# EAGLE board Sensor module (EAGLE 9.3.1)
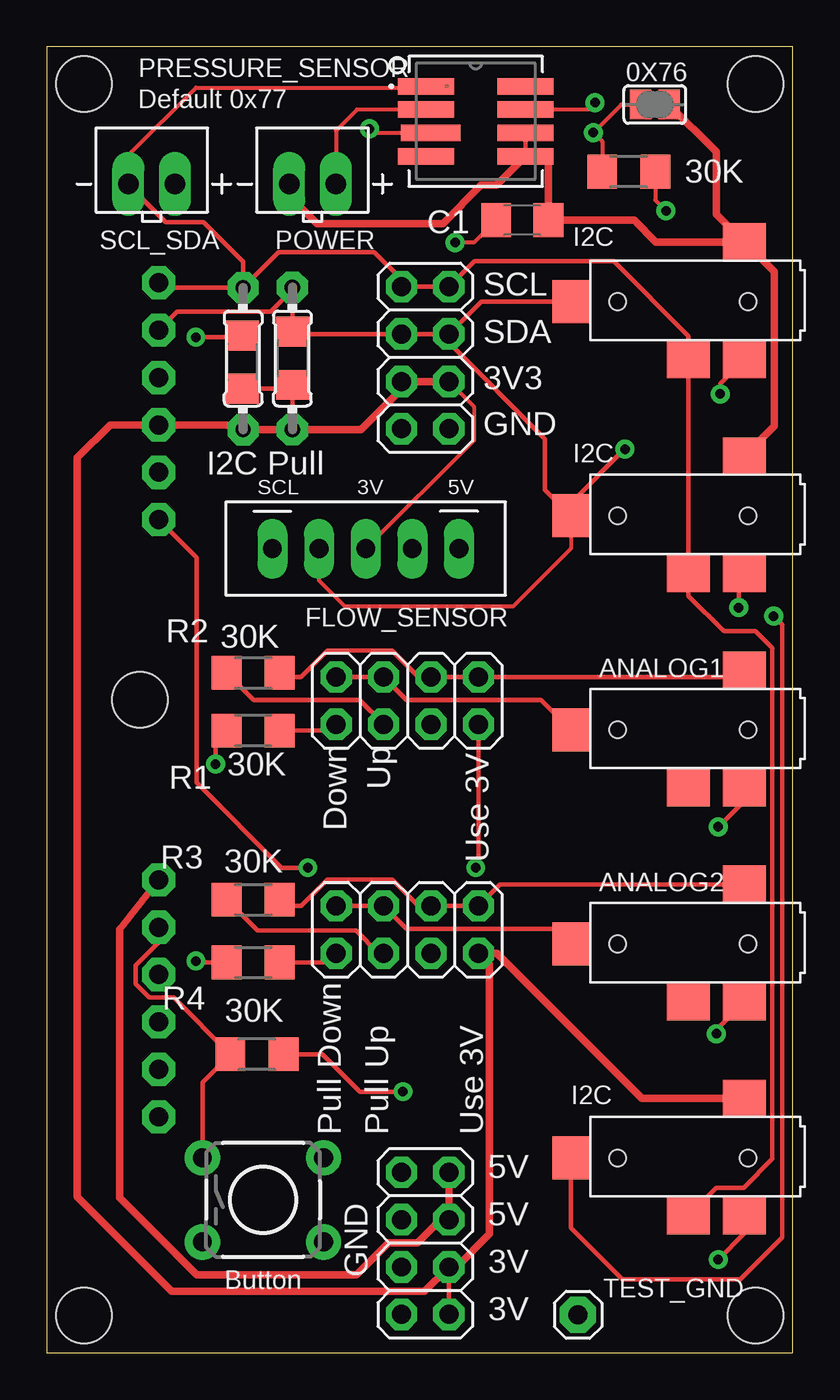
[diagram p0: board, top side]
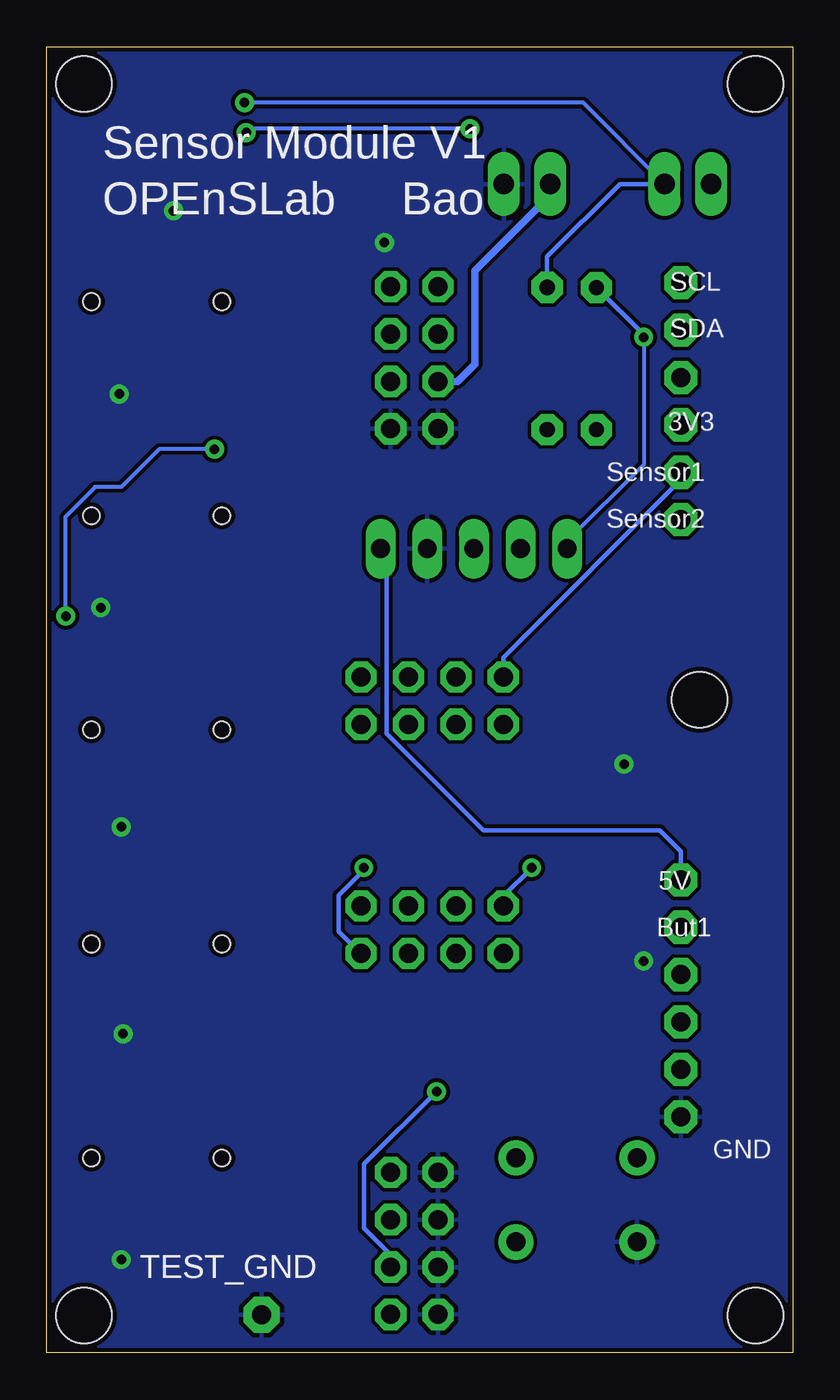
[diagram p1: board, bottom side, seen from below]

Size 40 x 70 mm. Coordinates in mm from the lower left corner, seen from the top.
Outline: 0,0 40,0 40,70 0,70 0,0
Copper layers (1*16): Top 0.035mm / dielectric 1.5mm / Bottom 0.035mm
Design rules "SparkFun": minimum track width 8mil, minimum drill 20mil, track to track 8mil, track to pad 8mil, pad to pad 8mil, via to via 8mil, smd to smd 8mil, copper to edge 10mil, drill to drill 8mil, minimum pad ring 12mil, minimum via ring 10mil, stop-mask expansion 4mil, vias tented up to drill 25mil, thermal gap 10mil
Holes 3 mm at 38,68 38,2 2,2 2,68 5,35

## Footprints (pad centres in the part's own frame; a part is rotated, then mirrored left to right if it is on the bottom)
SJ = smd 1.168 x 1.6: 1 -0.762,0; 2 0.762,0
AJ_2.5_SMD = smd 2 x 2.3: 1 6.3,0; 3 6.3,-3; 4 0,0 | smd 2.3 x 2: 2 3.2,-9.3 | hole 0.9: 3.2,0.2; 3.2,-6.8
C1206 = smd 1.6 x 1.8: 1 -1.4,0; 2 1.4,0
JST_5POS_2.5MM_UP = drill 1 long: 1 -5,0; 2 -2.5,0; 3 0,0; 4 2.5,0; 5 5,0
2X04 = drill 1.016 pad 1.676 octagon: 1 -3.81,-1.27; 2 -3.81,1.27; 3 -1.27,-1.27; 4 -1.27,1.27; 5 1.27,-1.27; 6 1.27,1.27; 7 3.81,-1.27; 8 3.81,1.27
JST_2POS_2.5MM_UP = drill 1.1 long: 1 -1.25,0; 2 1.25,0
MS5803-02BA01 = smd 3 x 0.889: 1 -2.675,1.875; 2 -2.675,0.625; 4 -2.675,-1.875; 5 2.675,-1.875; 6 2.675,-0.625; 7 2.675,0.625; 8 2.675,1.875 | smd 3.2 x 0.889: 3 -2.408,-0.625
R1206 = smd 1.6 x 1.803: 1 -1.422,0; 2 1.422,0
0204/7 = drill 0.813 pad 1.676 octagon: 1 -3.81,0; 2 3.81,0
TACTILE_SWITCH_PTH_6.0MM = drill 1.016 pad 1.88: 1 -3.251,2.261; 2 3.251,2.261; 3 -3.251,-2.261; 4 3.251,-2.261
1X01 = drill 1.016 pad 1.93 octagon: 1 0,0
1X06-CLEANBIG = drill 1.016 pad 1.778 octagon: 1 -6.35,0; 2 -3.81,0; 3 -1.27,0; 4 1.27,0; 5 3.81,0; 6 6.35,0

## Placement (x,y rotation side)
0X76  [SJ]  32.6,66.9 0 top
ANALOG1  AUDIOJACK_2.5MM_SMD  [AJ_2.5_SMD]  37.4,36.59 270 top
ANALOG2  AUDIOJACK_2.5MM_SMD  [AJ_2.5_SMD]  37.4,25.11 270 top
C1  100nF  [C1206]  25.5,60.7 180 top
FLOW_SENSOR  2.5MM_JST_UP_5POS  [JST_5POS_2.5MM_UP]  17.1,43.1 180 top
I2C_1  [2X04]  20.29,53.33 270 top
JP3  [2X04]  19.33,34.95 0 top
JP4  [2X04]  19.33,22.68 0 top
POWER  2.5MM_JST_UP_2POS  [JST_2POS_2.5MM_UP]  14.25,62.64 0 top
POWER_3-5  [2X04]  20.29,5.87 270 top
PRESSURE_SENSOR  MS580302BA01-00  [MS5803-02BA01]  23,66 0 top
R1  30K  [R1206]  11.07,33.34 0 top
R2  30K  [R1206]  11.07,36.44 180 top
R3  30K  [R1206]  11.07,24.29 180 top
R4  30K  [R1206]  11.07,20.93 180 top
R5  [R1206]  10.5,53.1 270 top
R6  [R1206]  13.2,53.3 270 top
R7  10K  [0204/7]  13.17,53.29 270 top
R8  10K  [0204/7]  10.53,53.28 270 top
R9  30K  [R1206]  11.27,16 0 top
R10  30K  [R1206]  31.2,63.3 0 top
S1  Button  [TACTILE_SWITCH_PTH_6.0MM]  11.6,8.2 0 top
SCL_SDA  2.5MM_JST_UP_2POS  [JST_2POS_2.5MM_UP]  5.63,62.64 0 top
TEST_GND  [1X01]  28.48,2.04 0 top
TO_LOGIC_BOARD1  [1X06-CLEANBIG]  6,51 270 top
TO_LOGIC_BOARD2  [1X06-CLEANBIG]  6,19 270 top
U$1  I2C  [AJ_2.5_SMD]  37.4,59.53 270 top
U$2  I2C  [AJ_2.5_SMD]  37.4,13.64 270 top
U$5  I2C  [AJ_2.5_SMD]  37.4,48.06 270 top

## Library data of the parts
0X76 = jumper
ANALOG1 ANALOG2 U$1 U$2 U$5 = myHeaders
C1 I2C_1 JP3 JP4 POWER_3-5 R1-R10 TEST_GND TO_LOGIC_BOARD1 TO_LOGIC_BOARD2 = adafruit
FLOW_SENSOR POWER SCL_SDA = eDNA
PRESSURE_SENSOR = eDNA; MANUFACTURER_PART_NUMBER: MS580302BA0100; VENDOR: TE Connectivity
S1 = SparkFun-Switches; PROD_ID: SWCH-08441; SF_SKU: COM-00097

## Nets
+3V3: 0X76.2 C1.1 FLOW_SENSOR.3 I2C_1.5 I2C_1.6 JP3.7 JP4.7 POWER.1 POWER_3-5.6 POWER_3-5.8 PRESSURE_SENSOR.5 PRESSURE_SENSOR.6 R5.2 R6.2 R7.2 R8.2 R9.2 TO_LOGIC_BOARD1.4 U$1.4 U$2.4 U$5.4
+5V: FLOW_SENSOR.1 POWER_3-5.2 POWER_3-5.4 TO_LOGIC_BOARD2.1
BUTTON1: R9.1 S1.1 TO_LOGIC_BOARD2.2
GND: ANALOG1.1 ANALOG2.1 C1.2 FLOW_SENSOR.2 I2C_1.7 I2C_1.8 POWER.2 POWER_3-5.1 POWER_3-5.3 POWER_3-5.5 POWER_3-5.7 PRESSURE_SENSOR.2 R1.1 R4.2 R10.2 S1.3 TEST_GND.1 TO_LOGIC_BOARD2.6 U$1.1 U$2.1 U$5.1
N$1: 0X76.1 PRESSURE_SENSOR.3 R10.1
N$3: ANALOG1.4 JP3.6 JP3.8 R2.1
N$4: JP3.3 R2.2
N$5: JP3.1 R1.2
N$6: JP4.3 R3.2
N$7: ANALOG2.4 JP4.6 JP4.8 R3.1
N$8: JP4.1 R4.1
SCL: FLOW_SENSOR.5 I2C_1.1 I2C_1.2 PRESSURE_SENSOR.1 R5.1 R8.1 SCL_SDA.1 TO_LOGIC_BOARD1.1 U$1.3 U$2.3 U$5.3
SDA: FLOW_SENSOR.4 I2C_1.3 I2C_1.4 PRESSURE_SENSOR.7 R6.1 R7.1 SCL_SDA.2 TO_LOGIC_BOARD1.2 U$1.2 U$2.2 U$5.2
SENSOR1: ANALOG1.2 JP3.2 JP3.4 TO_LOGIC_BOARD1.5
SENSOR2: ANALOG2.2 JP4.2 JP4.4 TO_LOGIC_BOARD1.6

## Tracks (layer width: path | path; a pad name or v marks a point on that pad's centre or on a via)
+3V3  (via drill 0.51)
  Top 0.203: FLOW_SENSOR.3 22.9,48.9 22.9,50.72 I2C_1.6
  Top 0.254: JP3.7 23.14,26.14 v23,26 | R9.2 14.8,16 16.8,14 v19.1,14 | POWER_3-5.8 POWER_3-5.6 | R5.2 13,51.68 R6.2 13.17,51.85 R7.2 | PRESSURE_SENSOR.6 PRESSURE_SENSOR.5
  Top 0.406: U$2.4 31.91,13.64 24.14,21.41 JP4.7 23.74,20.81 23.74,6.38 21.96,4.6 POWER_3-5.6 20.27,3.3 6.7,3.3 1.65,8.36 1.65,47.97 3.41,49.73 TO_LOGIC_BOARD1.4 10.27,49.73 R8.2 R7.2 16.84,49.48 19.02,51.66 I2C_1.5 I2C_1.6 | U$5.4 39,49.66 39,57.94 U$1.4 | POWER.1 13,62.02 14.5,60.52 21.24,60.52 23.29,62.57 24.12,62.57 PRESSURE_SENSOR.5 26.68,64.12 26.9,63.9 C1.1 31.5,60.7 32.66,59.53 U$1.4 | 0X76.2 35.9,64.36 35.9,61.03 U$1.4
  Bottom 0.254: v23,26 23,25.87 24.36,24.51 24.36,22.59 23.18,21.41 JP4.7 | POWER_3-5.6 21.56,5.26 22.98,6.67 22.98,10.12 v19.1,14
  Bottom 0.406: I2C_1.5 17.98,52.06 17.04,53 17.04,58 13,62.04 POWER.1
+5V
  Top 0.406: TO_LOGIC_BOARD2.1 3.92,22.7 3.92,8.3 8.04,4.18 16.62,4.18 18.33,5.89 19.89,5.89 21.2,7.2 21.5,7.2 | 21.5,7.2 POWER_3-5.4 | POWER_3-5.2 21.56,7.26 21.5,7.2
  Bottom 0.254: FLOW_SENSOR.1 21.77,42.77 21.77,33.2 16.57,28 7.14,28 6,26.86 TO_LOGIC_BOARD2.1
BUTTON1
  Top 0.254: S1.1 8.35,14.5 R9.1 6.8,19.05 5.5,19.05 4.78,19.77 4.78,20.77 6,21.99 TO_LOGIC_BOARD2.2
GND  (via drill 0.51)
  Top 0.203: R10.2 32.62,61.78 v33.2,61.2 | C1.2 22.9,59.5 v21.9,59.5 | PRESSURE_SENSOR.2 16.62,66.62 15.5,65.5 POWER.2
  Top 0.254: U$1.1 36.1,51.94 v36.1,51.39 | U$5.1 37.1,41.46 v37.1,39.93 | ANALOG1.1 37.4,29.59 v36,28.19 | ANALOG2.1 35.9,17.31 v35.9,17.09 | U$2.1 37.4,6.4 v36,5 | R1.1 9.05,32.74 v9.05,31.55 | R4.2 8.07,20.93 v8,21
  pour Bottom: 0,70 40,70 40,0 0,0
N$1  (via drill 0.51)
  Top 0.203: PRESSURE_SENSOR.3 17.52,65.38 v17.3,65.6 | R10.1 29.78,64.92 v29.3,65.4 30.8,66.9 0X76.1
  Bottom 0.203: v17.3,65.6 29.1,65.6 v29.3,65.4
N$3
  Top 0.254: ANALOG1.4 37.03,36.22 JP3.8 JP3.6 19.94,36.22 18.52,37.64 15.06,37.64 13.64,36.22 12.71,36.22 R2.1
N$4
  Top 0.254: JP3.3 18.06,33.72 16.79,35 11.09,35 R2.2
N$5
  Top 0.254: R1.2 15.19,33.34 JP3.1
N$6
  Top 0.254: JP4.3 17.8,21.41 16.59,22.63 11.31,22.63 R3.2
N$7
  Top 0.254: ANALOG2.4 24.31,25.11 JP4.8 JP4.6 19.94,23.95 18.52,25.37 15.06,25.37 13.64,23.95 12.83,23.95 R3.1
N$8
  Top 0.254: R4.1 15.04,20.93 JP4.1
SCL  (via drill 0.51)
  Top 0.203: SCL_SDA.1 4.38,64.18 8,67.8 20.25,67.8 PRESSURE_SENSOR.1
  Top 0.254: R8.1 12.44,59 17.56,59 19.02,57.54 I2C_1.1 I2C_1.2 22.92,58.5 30.4,58.5 34.4,54.5 U$1.3 U$5.3 34.4,40.57 36.29,38.68 37.99,38.68 38.9,37.77 38.9,10.39 37.36,8.85 35.91,8.85 U$2.3 | R8.1 10.53,58.47 8.4,60.6 6.39,60.6 4.38,62.61 SCL_SDA.1 | v8,54.42 10.4,54.42 R5.1 | TO_LOGIC_BOARD1.1 6.26,57.09 R8.1
  Bottom 0.203: v8,54.42 8,47.6 12.1,43.5 FLOW_SENSOR.5
  Bottom 0.254: R8.1 8,54.56 v8,54.42
SDA  (via drill 0.51)
  Top 0.203: U$5.2 28.1,43.1 25,40 16,40 14.6,41.4 FLOW_SENSOR.4 | v29.4,67 29.02,66.62 PRESSURE_SENSOR.7
  Top 0.254: I2C_1.4 I2C_1.3 13.32,54.6 R6.1 13.17,54.75 R7.1 13.23,57.03 12,55.8 6.99,55.8 TO_LOGIC_BOARD1.2 | I2C_1.4 23.3,56.34 U$1.2 | I2C_1.4 21.56,54.14 26.72,48.98 26.72,46.24 U$5.2 28.1,45.55 30.97,48.43 v31,48.43 | U$2.2 28.1,6.7 30.85,3.94 37.17,3.94 39.43,6.2 39.43,39.03 v38.98,39.48
  Bottom 0.203: v31,48.43 33.97,48.43 36,46.4 37.4,46.4 39,44.8 39,39.5 v38.98,39.48 | SCL_SDA.2 11.24,67 v29.4,67
  Bottom 0.254: R7.1 13.17,58.75 9.28,62.64 SCL_SDA.2
SENSOR1
  Top 0.254: ANALOG1.2 26.5,34.99 19.3,34.99 JP3.4 JP3.2
  Bottom 0.254: JP3.2 15.52,37.27 6,46.79 TO_LOGIC_BOARD1.5
SENSOR2  (via drill 0.51)
  Top 0.254: ANALOG2.2 27.3,22.71 19.3,22.71 JP4.4 JP4.2 | v14,26 12.6,26 8.03,30.57 8.03,42.62 TO_LOGIC_BOARD1.6
  Bottom 0.254: v14,26 15.52,24.48 JP4.2

## Text on the board
tPlace: Default 0x77 | 30K | I2C | SCL | SDA | 3V3 | GND | I2C Pull | I2C | SCL | 3V | 5V | Up | Down | Use 3V | 30K | I2C | Pull Down | Pull Up | Use 3V | 5V | 5V | GND | 3V | 3V
bPlace: Sensor Module V1 | Bao | OPEnSLab | SCL | SDA | 3V3 | Sensor1 | Sensor2 | 5V | But1 | GND | TEST_GND
Document: Pull Down | Pull Up | Use 5V | Use 3V | To Logic Board